# Altium PCB LSW0_HCMS29_STM32L0_Prototype.PcbDoc
Units mil, origin at the board's own origin, x right, y up, seen from the top; angles counter-clockwise.
Board outline 1790.94 x 1811.02 mil, 2 copper layers (Top Layer, Bottom Layer); 46 components, 55 nets, 201 pads, 40 vias.
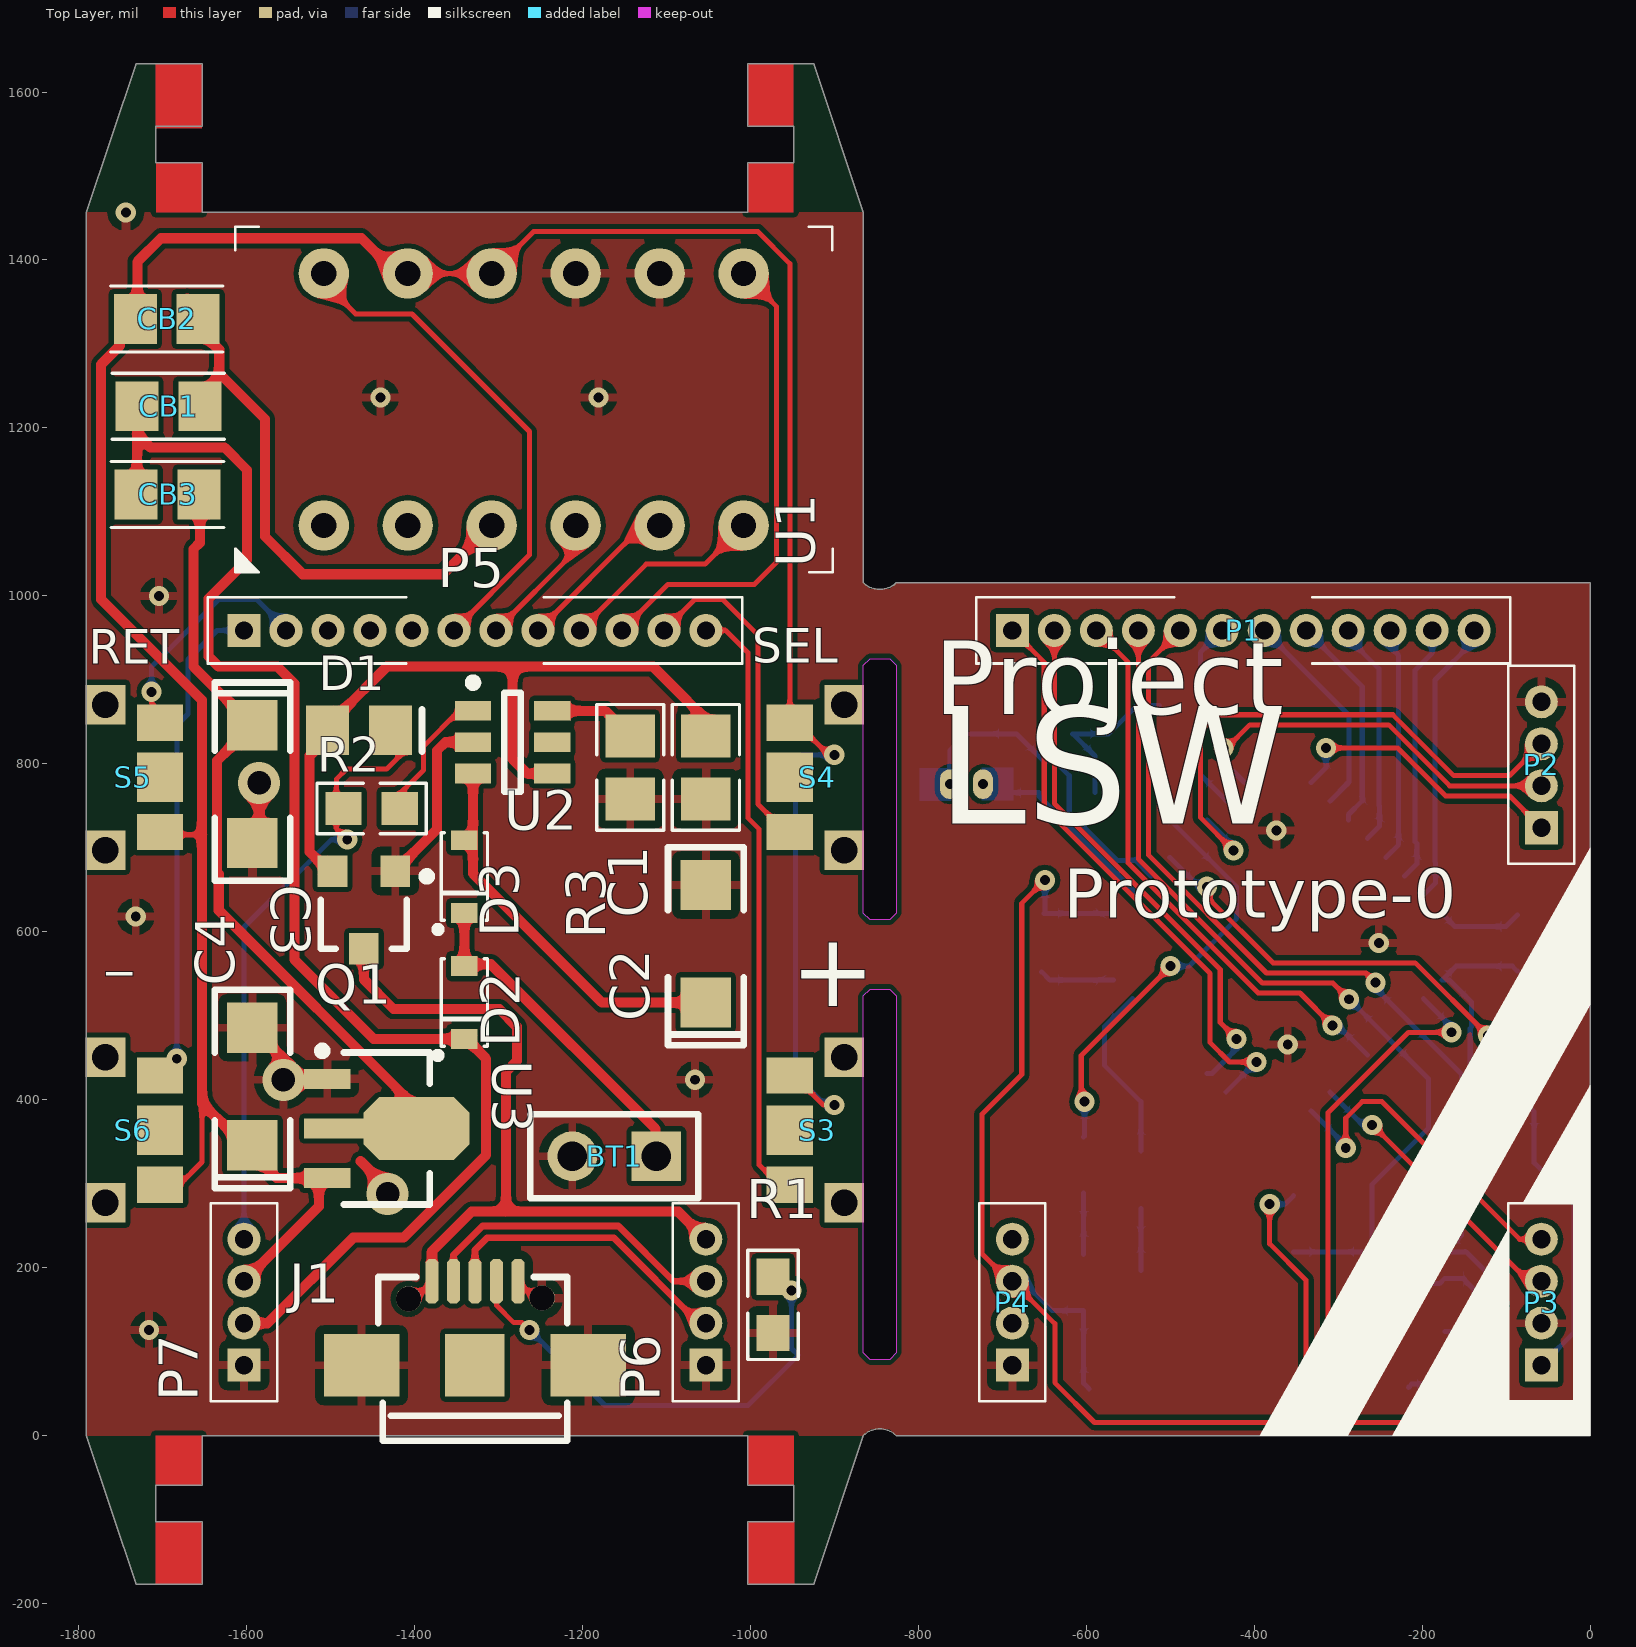
[diagram p0: Top Layer view]
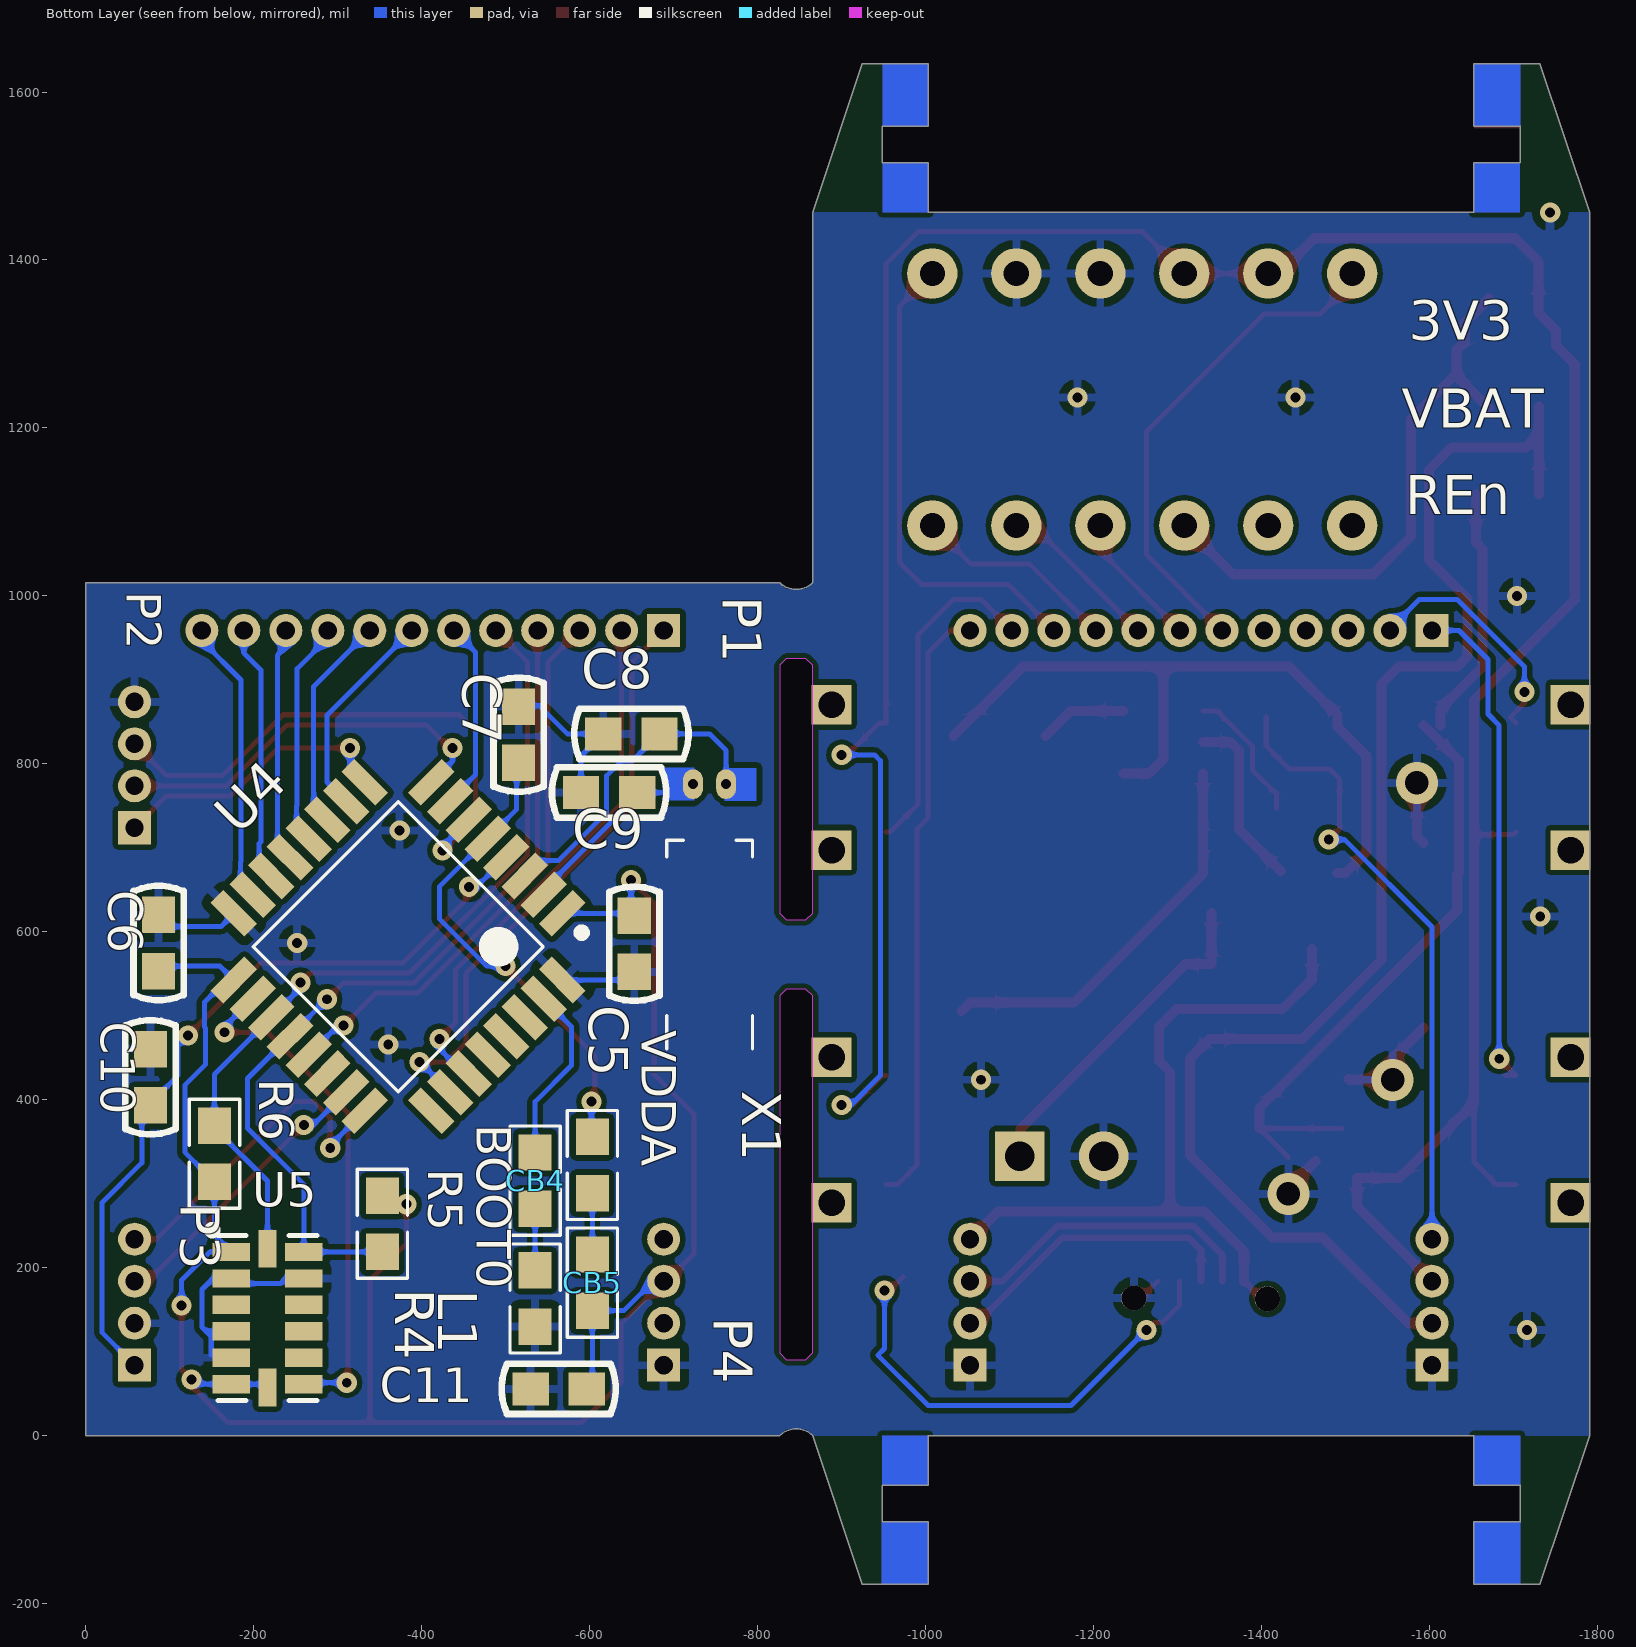
[diagram p1: Bottom Layer view, seen from below]

## Layer stack, top to bottom
Top Solder: solder mask 0.4, Solder Resist, Dk 3.5
Top Layer: signal copper 1.4
Dielectric 1: dielectric 12.6, FR-4, Dk 4.8
Bottom Layer: signal copper 1.4
Bottom Solder: solder mask 0.4, Solder Resist, Dk 3.5

## Board outline
-1708.26,-102.36 -1708.26,-59.06 -1653.14,-59.06 -1653.14,0 -1003.54,0 -1003.54,-59.06 -948.42,-59.06 -948.42,-102.36 -1003.54,-102.36 -1003.54,-177.17 -924.8,-177.17 -865.74,0 cw(c-846.26,-19.48) -826.77,0 0,0 0,1015.75 -826.77,1015.75 cw(c-846.26,1035.23) -865.74,1015.75 -865.74,1456.69 -924.8,1633.86 -1003.54,1633.86 -1003.54,1559.06 -948.42,1559.06 -948.42,1515.75 -1003.54,1515.75 -1003.54,1456.69 -1653.14,1456.69 -1653.14,1515.75 -1708.26,1515.75 -1708.26,1559.06 -1653.14,1559.06 -1653.14,1633.86 -1731.88,1633.86 -1790.94,1456.69 -1790.94,0 -1731.88,-177.17 -1653.14,-177.17 -1653.14,-102.36
cut-out: -865.74,523.62 -857.87,531.5 -834.65,531.5 -826.77,523.62 -826.77,98.43 -834.65,90.55 -857.87,90.55 -865.74,98.43
cut-out: -865.74,917.32 -857.87,925.2 -834.65,925.2 -826.77,917.32 -826.77,622.05 -834.65,614.17 -857.87,614.17 -865.74,622.05

## Design rules (kind name [scope] priority, off if disabled: settings)
Clearance [All] p1: gap=6 ignorepadtopadclearanceinfootprint=FALSE except(0: Arc-Hole Track-Hole SMDPad-Hole THPad-Hole Via-Hole Fill-Hole Poly-Hole Region-Hole Text-Hole)
ComponentClearance [All] p1 off: gap=10 collisioncheckmode=3 verticalgap=10 showdistances=FALSE
PolygonConnect [All] p1: connectstyle=Relief reliefconductorwidth=10 reliefentries=4 polygonreliefangle="90 Angle" airgapwidth=10
RoutingVias [All] p1: holewidth=28 width=50 viastyle="Through Hole" minholewidth=28 minwidth=50 maxholewidth=28 maxwidth=50
SolderMaskExpansion [All] p1: expansion=4
UnRoutedNet [All] p1: checkbadconnections=TRUE
Width [All] p1: maxlimit=15 minlimit=6 preferedwidth=6
28 further rules are at their usual default settings.

## Classes and differential pairs
component class LSWM_10: C5 C6 C7 C8 C9 C10 C11 CB4 CB5 L1 R4 R5 R6 U4 U5 X1
component class LSWM_00: BT1 C1 C2 C3 C4 CB1 CB2 CB3 D1 J1 Q1 R1 R2 R3 S3 S4 S5 S6 U1 U2 U3
component class LSW_0_HCMS29_STM32L0: P1 P2 P3 P4 P5 P6 P7

## Components (designator, comment, footprint, x,y, rotation, side; value= is the part's Value field where it differs from the comment)
BT1 "Battery" HDR2X1_A -1112.39,332.75 r180 top
C1 "Cap" 0805-1 -1053.39,795.75 r270 top value=1uF
C2 "Cap Pol" 1206-POL -1053.39,585.75 r90 top value=10uF
C3 "Cap Pol" 1206-POL -1593.39,775.75 r270 top value=10uF
C4 "Cap Pol" 1206-POL -1593.39,415.75 r90 top value=10uF
C5 "Cap" C-RAD-0603 -653.39,585.75 r270 bottom value=100nF
C6 "Cap" C-RAD-0603 -87,586.61 r270 bottom value=100nF
C7 "Cap" C-RAD-0603 -515.75,834.65 r270 bottom value=100nF
C8 "Cap" C-RAD-0603 -649.92,835.75 r180 bottom value=4.3pF
C9 "Cap" C-RAD-0603 -623.39,765.75 r180 bottom value=4.3pF
C10 "Cap" C-RAD-0603 -77.39,426.75 r270 bottom value=100nF
C11 "Cap" C-RAD-0603 -563.39,55.75 r180 bottom value=100nF
CB1 "Circuit Breaker" SB-0805 -1693.39,1225.75 r0 top
CB2 "Circuit Breaker" SB-0805 -1695.39,1329.75 r0 top
CB3 "Circuit Breaker" SB-0805 -1694.39,1120.75 r0 top
CB4 "Circuit Breaker" 0603-1 -535.39,303.75 r90 bottom
CB5 "Circuit Breaker" 0603-1 -603.39,182.28 r90 bottom
D1 "LED0" LED_0805 -1466.39,839.75 r0 top
D2 "Diode" "SOD323 - INV" -1340.94,515.75 r90 top
D3 "Diode" "SOD323 - INV" -1340.94,665.75 r90 top
J1 "USB_M" USB_MICRO -1328.34,83.86 r0 top
L1 "Inductor" 0603-1 -603.39,322.28 r90 bottom value=10uH
P1 "Header 12" HDR12X1_1.27mm -413.39,958.86 r0 top
P2 "Header 4" HDR4X1_1.27mm -58.39,723.86 r90 top
P3 "Header 4" HDR4X1_1.27mm -58.39,83.86 r90 top
P4 "Header 4" HDR4X1_1.27mm -688.39,83.86 r90 top
P5 "Header 12" HDR12X1_1.27mm -1328.34,958.86 r0 top
P6 "Header 4" HDR4X1_1.27mm -1053.34,83.86 r90 top
P7 "Header 4" HDR4X1_1.27mm -1603.34,83.86 r90 top
Q1 "MOSFET-P-E" SOT-23 -1460.63,625.98 r180 top
R1 "Res1" 0603-1 -973.39,155.75 r270 top value=100K
R2 "Res1" 0603-1 -1451.39,746.75 r180 top value=1.6K
R3 "Res1" 0805-1 -1143.39,795.75 r90 top value=1.6K
R4 "Res1" 0603-1 -535.39,163.28 r90 bottom value=10K
R5 "Res1" 0603-1 -353.39,252.28 r270 bottom value=10K
R6 "Res1" 0603-1 -153.39,335.75 r90 bottom value=10K
S3 "+" BTN_2_4_35 -888.34,363.86 r270 top
S4 "SEL" BTN_2_4_35 -888.34,783.86 r270 top
S5 "BACK" BTN_2_4_35 -1768.34,783.86 r90 top
S6 "-" BTN_2_4_35 -1768.34,363.86 r90 top
U1 "HCMS290x" HCMS-290x -1258.34,1233.86 r0 top
U2 "TP-4057" SOT23-6 -1283.39,825.75 r0 top
U3 "HT73xx" SOT89N -1433.39,365.75 r0 top
U4 "STM32L031K6" TQFP80P900X900X160-32N 98.34,582.23 r315 bottom
U5 "ADXL345BCCZ-RL7" LGA80P300X500-14N -216.59,140 r180 bottom
X1 "XTAL_SM" "X-2X6C - duplicate" -743.07,775.75 r180 bottom value=8M

## Footprints (in the part's own frame and the unit in brackets; to place one, negate y for a bottom-side part, rotate by r counter-clockwise, add the part's x,y. Pads: shape width x height; smd on the part's side, far side on the other; paste and mask are expansions set on the pad)
0603-1 [mm] "贴片带丝印"
  rect 1.1x1 smd: 1(-0.85,0) 2(0.85,0)
  silkscreen extent -1.65,-0.76 1.65,0.76, body extent -1.14,-0.38 1.14,0.38, height 1
0805-1 [mm] "贴片带丝印"
  rect 1.3x1.5 smd: 1(-0.95,0) 2(0.95,0)
  silkscreen extent -1.91,-1.02 1.91,1.02, body extent -1.14,-0.51 1.14,0.51, height 1
1206-POL [mil] "贴片元件"
  rect 60x60 smd: 1(-70,0) 2(70,0)
  silkscreen extent -121,-45 115,45, body extent -75,-35 75,35, height 39
BTN_2_4_35 [mm] "TS-018A 2*4*3.5 Key"
  rect 1.1x1.4 smd: 1(-1.65,-1.65) 2(1.65,-1.65)
  rect 1.2x1.2 hole 0.8: 3(-2.2,0) 3(2.2,0)
  rect 1.5x1.4 smd: 3(0,-1.65)
  body extent -2.25,-1.5 2.25,1.55, height 1.8
C-RAD-0603 [mm] "贴片电容"
  rect 1.1x1 smd: 1(-0.85,0) 2(0.85,0)
  silkscreen extent -1.73,-0.76 1.73,0.76, body extent -1.14,-0.38 1.14,0.38, height 1
HCMS-290x [mil]
  round 60 hole 30: 1(-250,-150) 2(-150,-150) 3(-50,-150) 4(50,-150) 5(150,-150) 6(250,-150) 7(250,150) 8(150,150) 9(50,150) 10(-50,150) 11(-150,150) 12(-250,150)
  silkscreen extent -355,-206 356,206, body extent -350,-201 350,201, height 200
HDR2X1_A [mm] "Connector; Header; 2 Position"
  rect 1.5x1.5 hole 0.9: 1(0,0)
  round 1.5 hole 0.9: 2(2.54,0)
  silkscreen extent -1.27,-1.27 3.81,1.27
HDR4X1_1.27mm [mm]
  rect 1x1 hole 0.55: 1(0,0)
  round 1 hole 0.55: 2(1.27,0) 3(2.54,0) 4(3.81,0)
  silkscreen extent -1.09,-1 4.9,1
HDR12X1_1.27mm [mm]
  rect 1x1 hole 0.55: 1(-6.985,0)
  round 1 hole 0.55: 2(-5.715,0) 3(-4.445,0) 4(-3.175,0) 5(-1.905,0) 6(-0.635,0) 7(0.635,0) 8(1.905,0) 9(3.175,0) 10(4.445,0) 11(5.715,0) 12(6.985,0)
  silkscreen extent -8.08,-1 8.08,1
LED_0805 [mm] "贴片二极管"
  rect 1.3x1.5 smd: 1(-0.95,0) 2(0.95,0)
  silkscreen extent 1.91,-0.64 1.91,0.64
LGA80P300X500-14N [mm] "LGA, 14-Leads, Body 5,0x3,0mm (max), Pitch 1,01mm, Pitch1 0,80mm, IPC Medium Density"
  rect 1.145x0.55 smd: 1(-1.098,2) 2(-1.098,1.2) 3(-1.098,0.4) 4(-1.098,-0.4) 5(-1.098,-1.2) 6(-1.098,-2) 8(1.098,-2) 9(1.098,-1.2) 10(1.098,-0.4) 11(1.098,0.4) 12(1.098,1.2) 13(1.098,2)
  rect 0.55x1.145 smd: 7(0,-2.097) 14(0,2.097)
  silkscreen extent -1.79,-2.5 1.5,2.78, body extent -1.5,-2.49 1.5,2.51, height 1.03
SB-0805 [mm] "Configurable Solder Bridge"
  rect 1.3x1.5 smd: 1(-0.95,0) 2(0.95,0)
  silkscreen extent -1.7,-1 1.7,1
"SOD323 - INV" [mm] "Molded SOD323, Body 2,7X1,35(MAX)"
  rect 0.6x0.8 smd mask+0: 1(1.1,0) 2(-1.1,0)
  silkscreen extent -1.7,-0.7 1.33,0.9, body extent -1.4,-0.67 1.4,0.68, height 1.1
SOT23-6 [mm] "Max4173"
  rect 1.1x0.6 smd: 1(-1.2,0.95) 2(-1.2,0) 3(-1.2,-0.95) 4(1.2,-0.95) 5(1.2,0) 6(1.2,0.95)
  silkscreen extent -1.32,-1.5 0.25,1.92, body extent -0.87,-1.5 0.87,1.5, height 1.45
SOT89N [mm] "SOT89, 3-Leads, Body 4.5x2.4 mm, Pitch 1.5mm, Lead Span 4.1mm, IPC Medium Density"
  rect 1.4x0.6 smd: 1(-1.8,1.5) 3(-1.8,-1.5)
  rect 1.8x0.6 smd: 2(-1.6,0)
  oct 3.2x1.9 smd: 2(0.9,0)
  silkscreen extent -2.07,-2.3 1.3,2.47, body extent -1.3,-2.3 1.3,2.3, height 1.6
SOT-23 [mm]
  rect 0.9x0.95 smd: 1(-0.95,-1.175) 2(0.95,-1.175) 3(0,1.175)
  silkscreen extent -2.03,-1.14 1.3,1.18
TQFP80P900X900X160-32N [mm] "TQFP, 32-Leads, Body 7.00x7.00mm, Pitch 0.80mm, IPC Medium Density"
  rect 1.45x0.55 smd: 1(-12.675,11.25) 2(-12.675,10.45) 3(-12.675,9.65) 4(-12.675,8.85) 5(-12.675,8.05) 6(-12.675,7.25) 7(-12.675,6.45) 8(-12.675,5.65) 17(-4.225,5.65) 18(-4.225,6.45) 19(-4.225,7.25) 20(-4.225,8.05) 21(-4.225,8.85) 22(-4.225,9.65) 23(-4.225,10.45) 24(-4.225,11.25)
  rect 0.55x1.45 smd: 9(-11.25,4.225) 10(-10.45,4.225) 11(-9.65,4.225) 12(-8.85,4.225) 13(-8.05,4.225) 14(-7.25,4.225) 15(-6.45,4.225) 16(-5.65,4.225) 25(-5.65,12.675) 26(-6.45,12.675) 27(-7.25,12.675) 28(-8.05,12.675) 29(-8.85,12.675) 30(-9.65,12.675) 31(-10.45,12.675) 32(-11.25,12.675)
  silkscreen extent -12.8,5.35 -5.35,12.2, body extent -12.95,3.95 -3.95,12.95, height 1.6
USB_MICRO [mm] "USB方孔"
  oct 0.4x1.35 smd: 1(-1.3,2.54) 2(-0.65,2.54) 3(0,2.54) 4(0.65,2.54) 5(1.3,2.54)
  rect 2.286x1.9 smd: 6(3.429,0) 7(-3.429,0)
  rect 1.8x1.9 smd: 8(0,0)
  silkscreen extent -2.92,-2.29 2.79,2.67
"X-2X6C - duplicate" [mm] "Cylinder Xtal"
  oval 0.6x0.9 hole 0.3: 1(-0.5,0) 2(0.5,0)
  silkscreen extent -1.3,-8 1.3,-1.7, body extent -0.99,-8 1,-2, height 2

## Part data
BT1: library part Battery_1, "备份电池", LatestRevisionDate=17-Jul-2002, LatestRevisionNote="Re-released for DXP Platform.", PackageReference=BAT-2, Published=24-Mar-1999, Publisher="Altium Limited"
C1 C5 C6 C7 C8 C9 C10 C11: "无极性电容", LatestRevisionDate=17-Jul-2002, LatestRevisionNote="Re-released for DXP Platform.", PackageReference=RAD-0.3, Published=8-Jun-2000, Publisher="Altium Limited"
C2 C3 C4: "极性电解电容", LatestRevisionDate=17-Jul-2002, LatestRevisionNote="Re-released for DXP Platform.", PackageReference=RB7.6-15, Published=8-Jun-2000, Publisher="Altium Limited", Vol=16V
D1: "发光二极管", LatestRevisionDate=08-Jul-2005, LatestRevisionNote="Mech Layer 1 removed.", PackageReference=LED-0, Published=8-Jun-2000, Publisher="Altium Limited"
D2 D3: "二极管", PackageDocument=Sep-1996, Code_JEDEC=DO-214-AB, LatestRevisionDate=17-Jul-2002, LatestRevisionNote="Re-released for DXP Platform.", PackageReference=SMC, Published=8-Jun-2000, Publisher="Altium Limited", Type=1N4001
J1: "MicroUSB接口"
L1: "电感", Code_IEC=1005, Code_JEITA=0402, LatestRevisionDate=17-Jul-2002, LatestRevisionNote="Re-released for DXP Platform.", PackageReference=0402-A, Published=8-Jun-2000, Publisher="Altium Limited"
P1 P2 P3 P4 P5 P6 P7: "接插件", LatestRevisionDate=17-Jul-2002, LatestRevisionNote="Re-released for DXP Platform.", Publisher="Altium Limited"
Q1: "P-Channel Enhanced MOSFET", PackageDocument=1995/1996, LatestRevisionDate=17-Jul-2002, LatestRevisionNote="Re-released for DXP Platform.", PackageReference=E3, Published=8-Jun-2000, Publisher="Altium Limited"
R1 R2 R3 R4 R5 R6: "贴片电阻", LatestRevisionDate=17-Jul-2002, LatestRevisionNote="Re-released for DXP Platform.", PackageReference=AXIAL-0.4, Published=8-Jun-2000, Publisher="Altium Limited"
S3 S4 S5 S6: library part SW-PB, "微动开关", LatestRevisionDate=17-Jul-2002, LatestRevisionNote="Re-released for DXP Platform.", PackageReference=SPST-2, Published=24-Mar-1999, Publisher="Altium Limited"
U1: "HCMS LED display module"
U2: "500mA Linear Lithium Battery Charger"
U5: library part ADI-ADXL34X-CC-14-1, "3-Axis, +/-2 g / +/-4 g / +/-8 g / +/-16 g Digital Accelerometer with Digital Output, 1.6 KHz BW, Industrial, 14-pin LGA, Reel"
X1: "圆柱晶振", LatestRevisionDate=17-Jul-2002, LatestRevisionNote="Re-released for DXP Platform.", PackageReference=R38, Published=8-Jun-2000, Publisher="Altium Limited"
CB1 CB2 CB3 CB4 CB5: LatestRevisionDate=17-Jul-2002, LatestRevisionNote="Re-released for DXP Platform.", PackageDescription="Switch; 2 Leads", PackageReference=SPST-2, Published=24-Mar-1999, Publisher="Altium Limited"

## Free pads (board coordinates)
  round 30 hole 30 paste+0 mask+0: 0(-1407.34,162.86) 0(-1248.34,163.86)

## Via types
v1: diameter 24, hole 11.81, Top Layer to Bottom Layer, 37 vias
v2: diameter 50, hole 28, Top Layer to Bottom Layer, 3 vias

## Nets (pads, with @x,y where several pads share a name; then routed paths per layer and width w, separated by ;. In a path a pad name is that pad's centre, name@x,y a point inside that pad or via, vN(x,y) a via of type N, cw(c..) or ccw(c..) an arc to the next point about the centre after c; other vN are vias at no path point)
3V3: C4.1 CB2.1 P7.3 S3.1 S4.1 S5.1 S6.1 U1.10 U1.11 U3.3 | length 3597.7
  Top Layer w6: S6.1 -1680.24,298.9 -1653.39,325.75 -1653.39,395.75 ; S5.1 -1700.23,715.75 -1653.39,715.75 ; U1.11 U1.10 -1258.34,1433.86 -991.5,1433.86 -953.3,1395.66 S4.1 -945.46,848.82 -907.39,810.75 v1(-900.39,810.75) ; S3.1 -948.45,428.82 -913.37,393.75 v1(-900.39,393.75)
  Top Layer w12: P7.3 -1514.25,272.94 -1514.25,306.69 -1564.33,306.69 -1653.39,395.75 -1653.39,715.75 -1653.39,875.75 -1773.39,995.75 -1773.39,1275.75 -1750.79,1298.35 -1750.79,1316.35 -1730.39,1336.75 -1730.39,1397.75 -1702.28,1425.86 -1463.5,1425.86 -1421.5,1383.86 U1.11
  Bottom Layer w6: v1(-900.39,393.75) -911.39,393.75 -946.39,428.75 -946.39,803.75 -939.39,810.75 v1(-900.39,810.75)
ADXL_INT1: U4.18 U5.8 | length 614.5
  Top Layer w6: v1(-311.02,62.99) -312.34,64.31 -312.34,384.51 -216.54,480.31 v1(-165.35,480.31)
  Bottom Layer w6: v1(-311.02,62.99) -261.54,62.99 U5.8 ; U4.18 -165.35,486.8 v1(-165.35,480.31)
ADXL_INT2: U5.9
GND: BT1.2 C1.2 C2.2 C3.2 C4.2 C5.2 C6.1 C7.1 C8.1 C9.1 C10.1 C11.1 J1.5 J1.6 J1.7 P2.4 P3.2 P4.1 P6.1 P7.1 pad.0@-1248.34,163.86 Q1.1 R1.2 R3.1 R4.1 U1.8 U1.9 U2.2 U3.1 U4.16 U4.32 U5.2 U5.4 U5.5 U5.12 | length 1166.2
  Top Layer w6: C4.2@-1593.39,483.75 C4.2 ; J1.5 -1257.16,163.86 pad.0@-1248.34,163.86
  Top Layer w12: C4.2 -1556.39,448.75 v2(-1556.39,423.75) -1505.31,423.75 U3.1 ; C3.2 -1585.39,713.75 v2(-1585.39,777.39) ; -1464.39,326.75 -1432.39,294.75 v2(-1432.39,287.75) ; Q1.1 -1373.39,722.09 -1373.39,815.75 -1363.39,825.75 U2.2
  Bottom Layer w6: C5.2 -643.66,542.56 U4.32 ; C9.1 -589.92,809.21 C8.1 -573.7,835.75 -540.24,869.21 C7.1@-513.39,869.21 ; U5.12 -238.43,187.24 -232.28,181.1 -179.53,181.1 U5.2 -151.81,187.24 -138.59,174.03 -138.59,129.12 -143.46,124.25 ; U4.16 -176.57,621.45 -161.42,606.3 -100.78,606.3 C6.1 ; U5.5 -169.92,96.22 -149.61,96.22 -149.61,118.11 -143.46,124.25 ; U5.4 -143.46,124.25
  other v1: -1716.54,125.98 -1066.39,423.75 -360.39,465.75 -251.97,586.61 -1732.28,618.11 -374.02,720.47 -1704.72,1000 -1440.94,1236.22 -1181.1,1236.22 -1744.09,1456.69
NetBT1_1: BT1.1 D2.1 D3.2 | length 379.4
  Top Layer w12: D3.2 -1340.94,561.42 -1309.45,561.42 -1113.39,365.35 BT1.1@-1113.39,355.75
NetC1_1: C1.1 D1.1 Q1.2 U2.4 | length 902.9
  Top Layer w12: Q1.2@-1490.16,670.12 -1500.35,670.12 -1525.19,694.95 -1525.19,809.75 -1490.89,844.05 -1490.89,858.25 -1433.39,915.75 -1283.39,915.75 ; U2.4 -1266.14,788.35 -1283.39,805.59 -1283.39,915.75 ; C1.1@-1033.39,833.15 -1115.98,915.75 -1283.39,915.75
NetC2_1: C2.1 D3.1 U2.3 | length 474.1
  Top Layer w12: U2.3 -1330.63,669.21 -1177.17,515.75 C2.1 C2.1@-1043.39,505.75
NetC3_1: C3.1 CB3.2 U3.2 | length 1041.6
  Top Layer w6: U3.2@-1496.38,365.75 -1397.95,365.75 U3.2@-1432.39,331.31
  Top Layer w12: CB3.2@-1655.98,1120.75 -1655.98,1063.15 -1663.39,1055.75 -1663.39,915.75 -1613.39,865.75 C3.1@-1613.39,845.75 ; C3.1 -1635.39,803.75 -1635.39,670.78 -1633.39,668.78 -1633.39,625.51 -1397.95,390.08 U3.2@-1397.95,365.75
NetC8_2: C8.2 U4.3 X1.2 | length 383.7
  Bottom Layer w6: X1.2 -762.76,815.98 -742.99,835.75 C8.2 -650.79,803.15 -637.8,803.15 -620.57,785.93 -620.57,742.34 -563.28,685.04 -541.76,685.04 U4.3
NetC9_2: C9.2 U4.2 X1.1 | length 238.4
  Bottom Layer w6: X1.1 -713.39,765.75 C9.2 -656.85,761.64 -545.44,650.23 U4.2
NetCB1_2: CB1.2 CB2.2 U1.3 | length 690
  Top Layer w12: CB1.2@-1670.94,1223.86 -1632.83,1261.97 ; CB2.2@-1670.94,1353.86 -1642.39,1325.31 -1642.39,1302.75 -1632.83,1293.19 -1632.83,1261.97 ; U1.3 -1366.45,1025.75 -1533.39,1025.75 -1578.39,1070.75 -1578.39,1210.75 -1629.61,1261.97 -1632.83,1261.97
NetCB4_1: CB4.1 R4.2 | length 73.5
  Bottom Layer w6: R4.2 CB4.1
NetCB4_2: CB4.2 U4.31 | length 212.8
  Bottom Layer w6: U4.31 -578.74,486.99 -578.74,440.94 -535.39,397.59 CB4.2@-535.39,339.21
NetCB5_2: CB5.2 L1.1 | length 73.1
  Bottom Layer w6: CB5.2 L1.1
NetD1_2: D1.2 P7.4 R2.2 | length 753.7
  Top Layer w6: v1(-1480.39,709.75) -1493.39,722.75 -1493.39,781.75 -1481.39,793.75 -1433.39,793.75 -1405.98,821.15 D1.2@-1405.98,855.75
  Bottom Layer w6: P7.4 -1603.34,605.8 -1499.39,709.75 v1(-1480.39,709.75)
NetJ1_1: J1.1 P6.4 pad.0@-1407.34,162.86 Q1.3 | length 899.2
  Top Layer w6: pad.0@-1407.34,162.86 -1400.52,162.86 J1.1
  Top Layer w12: Q1.3 -1460.63,543.31 -1425.28,507.95 -1299.29,507.95 -1278.39,487.05 -1278.39,446.02 -1291.34,433.07 -1291.34,266.75 ; J1.1 -1379.52,219.61 -1332.39,266.75 -1291.34,266.75 ; P6.4 -1086.23,266.75 -1291.34,266.75
NetJ1_2: J1.2 P6.3 | length 373.5
  Top Layer w8: J1.2 -1353.93,215.2 -1319.39,249.75 -1157.59,249.75 -1091.7,183.86 P6.3
NetJ1_3: J1.3 P6.2 | length 360.5
  Top Layer w8: J1.3 -1328.34,221 -1313.59,235.75 -1163.39,235.75 -1061.5,133.86 P6.2
NetJ1_4: J1.4 R1.1 | length 571.5
  Top Layer w6: J1.4 -1302.75,155.11 -1282.08,134.45 -1272.08,134.45 v1(-1263.39,125.75) ; R1.1 -956.92,172.75 v1(-951.39,172.75)
  Bottom Layer w6: v1(-1263.39,125.75) -1173.39,35.75 -1003.39,35.75 -943.39,95.75 -951.39,103.75 v1(-951.39,172.75)
NetP5_1: P5.1 S6.2 | length 603.3
  Top Layer w6: S6.2@-1690.31,428.82 S6.2 v1(-1683.39,448.81)
  Bottom Layer w6: v1(-1683.39,448.81) -1683.39,845.75 -1669.91,859.22 -1669.91,924.32 -1635.38,958.86 P5.1
NetP5_2: P5.2 S5.2 | length 286.4
  Top Layer w6: v1(-1713.39,885.75) -1713.39,872.44 -1696.57,855.63 S5.2
  Bottom Layer w6: v1(-1713.39,885.75) -1713.39,915.75 -1633.39,995.75 -1588.13,995.75 -1553.34,960.96 P5.2
NetP5_6: P5.6 U1.12 | length 626.7
  Top Layer w6: U1.12 -1496.45,1395.75 -1496.45,1361.81 -1470.39,1335.75 -1403.39,1335.75 -1263.39,1195.75 -1263.39,1048.81 P5.6
NetP5_7: P5.7 U1.4 | length 164.4
  Top Layer w6: P5.7 -1208.34,1053.86 U1.4
NetP5_8: P5.8 U1.5 | length 196.8
  Top Layer w6: P5.8 -1128.34,1083.86 U1.5
NetP5_9: P5.9 U1.6 | length 246.8
  Top Layer w6: P5.9 -1124.45,1037.75 -1054.45,1037.75 U1.6
NetP5_10: P5.10 U1.7 | length 577.7
  Top Layer w6: P5.10 -1098.45,1013.75 -995.39,1013.75 -969.34,1039.8 -969.34,1344.86 U1.7
NetP5_11: P5.11 S4.2 | length 398.1
  Top Layer w6: P5.11 -1066.45,995.75 -1033.39,995.75 -991.39,953.75 -991.39,752.13 -958.15,718.9 S4.2
NetP5_12: P5.12 S3.2 | length 723
  Top Layer w6: P5.12 -1029.72,958.86 -1003.39,932.52 -1003.39,735.75 -989.86,722.22 -989.86,322.22 -966.54,298.9 S3.2
NetR2_1: R2.1 U2.1 | length 162.3
  Top Layer w6: R2.1 -1417.92,764.21 -1389.39,792.75 -1389.39,820.96 -1347.2,863.15 U2.1
NetR3_2: R3.2 U2.6 | length 105.2
  Top Layer w12: U2.6 -1173.39,863.15 R3.2
STM32L0_EXTI0: P1.11 U4.14 | length 307.7
  Bottom Layer w6: U4.14 -206.55,681.01 -206.55,704.97 -208.66,707.09 -208.66,911.61 -188.39,931.89 P1.11
STM32L0_EXTI1: P1.12 U4.15 | length 340.7
  Bottom Layer w6: U4.15 -198.35,644.17 -184.28,658.24 -184.28,682.7 -185.04,683.46 -185.04,899.8 -138.39,946.46 P1.12
STM32L0_EXTI3: P1.1 U4.26 | length 704.5
  Top Layer w6: P1.1 -650.39,920.86 -650.39,747.86 -452.76,550.23 -452.76,467.98 -429.66,444.88 v1(-397.64,444.88)
  Bottom Layer w6: U4.26 -398.13,444.88 v1(-397.64,444.88)
STM32L0_EXTI4: P1.2 U4.27 | length 635.4
  Top Layer w6: P1.2 -638.39,752.83 -440.76,555.2 -440.76,491.94 v1(-421.26,472.44)
  Bottom Layer w6: U4.27 -450.68,431.21 -421.26,460.63 v1(-421.26,472.44)
STM32L0_I2C1_SCL: P1.5 R6.2 U4.19 U5.14 | length 993.2
  Top Layer w6: P1.5 -526.39,920.86 -526.39,691.74 -385.64,550.99 -267.53,550.99 v1(-255.91,539.37)
  Bottom Layer w6: v1(-255.91,539.37) -255.91,532.81 U4.19 -153.39,430.29 R6.2 ; U5.14 -216.59,303.09 R6.2@-157.48,362.2
STM32L0_I2C1_SDA: P1.4 R5.2 U4.20 U5.13 | length 1053.7
  Top Layer w6: P1.4 -538.39,686.77 -390.61,538.99 -306.71,538.99 v1(-287.4,519.69)
  Bottom Layer w6: R5.2 -259.88,218.82 U5.13 -259.8,299.25 -192.91,366.14 -192.91,425.28 -287.32,519.69 v1(-287.4,519.69)
STM32L0_LPUART_RX: P2.1 U4.9 | length 344.3
  Top Layer w6: v1(-314.96,818.9) -229.57,818.9 -172.53,761.86 -96.39,761.86 P2.1
  Bottom Layer w6: U4.9 -314.96,795.31 v1(-314.96,818.9)
STM32L0_LPUART_TX: P2.2 U4.8 | length 471.6
  Top Layer w6: v1(-437.01,818.9) -433.07,818.9 -405.51,846.46 -240.16,846.46 -167.56,773.86 P2.2
  Bottom Layer w6: v1(-437.01,818.9) -437.01,803 U4.8
STM32L0_NRST: C10.2 P3.1 U4.4 | length 924.7
  Top Layer w6: v1(-456.69,653.54) -456.69,641.73 -377.95,562.99 -208.66,562.99 v1(-122.05,476.38)
  Bottom Layer w6: U4.4 -465.72,653.54 v1(-456.69,653.54) ; v1(-122.05,476.38) -110.24,464.57 -110.24,429.13 -66.93,385.83 -66.93,324.88 -19.68,277.64 -19.68,122.56 P3.1
STM32L0_PA0: P2.3 U4.6 | length 667.6
  Top Layer w6: v1(-425.2,696.85) -464.57,736.22 -464.57,838.58 -444.69,858.46 -235.19,858.46 -162.59,785.86 -96.39,785.86 P2.3
  Bottom Layer w6: U4.6 -425.2,702.1 v1(-425.2,696.85)
STM32L0_PA1: P1.6 U4.7 | length 226.8
  Bottom Layer w6: P1.6 -464.57,932.68 -464.57,787.4 -434.08,756.92 U4.7
STM32L0_PA4: P1.7 U4.10 | length 254.6
  Bottom Layer w6: P1.7 -287.4,857.87 -287.4,778.33 U4.10
STM32L0_PA5: P1.8 U4.11 | length 260
  Bottom Layer w6: P1.8 -271.65,892.13 -271.65,755.91 -287.93,739.63 U4.11
STM32L0_PA6: P1.9 U4.12 | length 269.4
  Bottom Layer w6: P1.9 -288.39,949.8 -251.97,913.39 -251.97,750.39 -251.09,749.51 -251.09,725.55 U4.12
STM32L0_PA7: P1.10 U4.13 | length 280.5
  Bottom Layer w6: U4.13 -228.35,703.75 -228.35,929.13 -238.39,939.17 P1.10
STM32L0_PA11: P1.3 U4.21 | length 672.1
  Top Layer w6: P1.3 -550.39,920.86 -550.39,681.8 -395.58,526.99 -345.89,526.99 v1(-307.09,488.19)
  Bottom Layer w6: v1(-307.09,488.19) -300.37,488.19 U4.21
STM32L0_PA12: U4.22
STM32L0_PB5: U4.28
STM32L0_PB6: U4.29
STM32L0_PB7: U4.30
STM32L0_SWCLK: P3.4 U4.24 | length 405.6
  Top Layer w6: v1(-291.34,342.52) -291.34,377.95 -271.65,397.64 -248.03,397.64 -84.25,233.86 P3.4
  Bottom Layer w6: U4.24 -291.34,345.53 v1(-291.34,342.52)
STM32L0_SWDIO: P3.3 U4.23 | length 345
  Top Layer w6: v1(-259.84,370.08) -73.62,183.86 P3.3
  Bottom Layer w6: U4.23 -271.34,370.08 v1(-259.84,370.08)
VBAT: CB1.1 CB3.1 D2.2 P7.2 | length 1702.6
  Top Layer w12: CB3.1@-1730.79,1120.75 -1730.79,1193.15 ; CB1.1 -1730.79,1193.15 ; P7.2 -1575.28,133.86 -1473.39,235.75 -1413.39,235.75 -1314.96,334.17 -1314.96,448.75 -1338.65,472.44 D2.2 -1448.82,472.44 -1543.39,567.01 -1543.39,895.75 -1563.39,915.75 -1633.39,915.75 -1645.39,927.75 -1645.39,996.81 -1599.64,1042.56 -1599.64,1150 -1626.39,1176.75 -1714.39,1176.75 -1730.79,1193.15
VDD: C5.1 C6.2 C11.2 CB5.1 P4.3 R5.1 R6.1 U4.1 U4.17 U5.1 U5.6 U5.7 | length 2619.6
  Top Layer w6: v1(-649.61,661.42) -677.17,633.86 -677.17,429.95 -724.41,382.71 -724.41,216.54 -691.73,183.86 P4.3 -637.8,133.27 -637.8,62.99 -590.55,15.75 -338.58,15.75 ; v1(-381.89,275.59) -381.89,228.35 -338.58,185.04 -338.58,15.75 ; v1(-114.39,154.75) -114.39,78.53 v1(-125.98,66.93) -125.98,59.06 -169.29,15.75 -338.58,15.75
  Bottom Layer w6: P4.3 -675.98,183.86 -640.94,148.82 CB5.1 -603.39,62.28 C11.2 ; v1(-649.61,661.42) -649.61,622.99 -650.7,621.9 U4.1 ; v1(-381.89,275.59) -363.54,275.59 R5.1 ; U5.7 -212.76,61.26 U5.6 -131.65,61.26 v1(-125.98,66.93) ; v1(-114.39,154.75) -114.39,185.25 -147.87,218.74 U5.1 -153.39,238.74 R6.1 -118.11,337.56 -118.11,417.32 -143.05,442.26 -143.05,485.08 -141.73,486.39 -141.73,516.25 -168.04,542.56 U4.17 -160.08,559.06 -92.9,559.06 C6.2
VDDA: C7.2 L1.2 U4.5 | length 576.4
  Top Layer w6: v1(-602.36,397.64) -606.3,401.57 -606.3,452.76 v1(-500,559.06)
  Bottom Layer w6: L1.2 -602.36,356.77 v1(-602.36,397.64) ; C7.2@-513.39,802.28 -513.39,745.75 -421.26,653.62 -421.26,615.67 -477.87,559.06 v1(-500,559.06)
pads on no net: J1.8 P4.2 P4.4 P5.3 P5.4 P5.5 S3.3 S4.3 S5.3 S6.3 U1.1 U1.2 U2.5 U4.25 U5.3 U5.10 U5.11

## Polygon pours and split planes (outlines as drawn)
GND on Bottom Layer "GND_L02_P004" (solid, remove dead copper, pour order 4): -1790.94,1456.69 -865.74,1456.69 -865.74,1015.75 -857.87,1007.87 -834.65,1007.87 -826.77,1015.75 0,1015.75 0,0 -5.39,0 -826.77,0 -834.65,7.87 -857.87,7.87 -865.74,0 -1790.94,0
GND on Top Layer "GND_L01_P006" (solid, remove dead copper, pour order 6): -1790.94,1456.69 -865.74,1456.69 -865.74,1015.75 -857.87,1007.87 -834.65,1007.87 -826.77,1015.75 0,1015.75 0,0 -5.39,0 -826.77,0 -834.65,7.87 -857.87,7.87 -865.74,0 -1790.94,0

## Other copper
Top Layer:
  rectangle: -1708.26,1556.75 -1653.14,1559.06
  region: -1653.54,0 -1708.66,0 -1708.66,-59.06 -1653.54,-59.06
  region: -1653.14,-102.36 -1708.66,-102.36 -1708.66,-177.17 -1653.14,-177.17
  region: -948.42,0 -1003.54,0 -1003.54,-59.06 -948.42,-59.06
  region: -948.02,-102.36 -1003.54,-102.36 -1003.54,-177.17 -948.02,-177.17
  rectangle: -1003.94,1456.69 -948.82,1515.75
  rectangle: -1004.34,1559.06 -948.82,1633.86
  rectangle: -1708.66,1559.06 -1653.14,1633.86
  rectangle: -1708.26,1456.69 -1653.14,1515.75
Bottom Layer:
  region net NetC9_2: -686.93,795.59 -725.35,795.59 -725.35,756.22 -686.93,756.22
  rectangle net NetC8_2: -799.21,755.91 -760.79,795.28
  region: -1653.54,0 -1708.66,0 -1708.66,-59.06 -1653.54,-59.06
  region: -1653.14,-102.36 -1708.66,-102.36 -1708.66,-177.17 -1653.14,-177.17
  region: -948.42,0 -1003.54,0 -1003.54,-59.06 -948.42,-59.06
  region: -948.02,-102.36 -1003.54,-102.36 -1003.54,-177.17 -948.02,-177.17
  rectangle: -1003.94,1456.69 -948.82,1515.75
  rectangle: -1004.34,1559.06 -948.82,1633.86
  rectangle: -1708.66,1559.06 -1653.14,1633.86
  rectangle: -1708.26,1456.69 -1653.14,1515.75

## Silkscreen, mask and mechanical layers (free items; w line width, h text height)
Top Overlay:
  region: 0,417.22 -80.71,276.97 -19.02,276.97 -19.02,40.75 -97.76,40.75 -97.76,246.06 -184.84,90.75 -236.22,0 0,0
  region: 0,699.91 0,513.27 -288.71,0 -393.7,0
  text "SEL" at -998.39,906.75 h70
  text "RET" at -1788.39,905.75 h70
  text "Project" at -781.5,830.71 h150
  text "LSW" at -778.54,683.07 h240
  text "Prototype-0" at -627.21,597.56 h100
  text "-" at -1773.39,491.75 h150
  text "+" at -952.39,482.75 h150
Bottom Overlay:
  text "3V3" at -1575.39,1289.75 h80
  text "VBAT" at -1567.39,1184.75 h80
  text "REn" at -1571.39,1081.75 h80
  text "VDDA" at -648.39,482.75 h70 r90
  text "BOOT0" at -452.39,370.75 h70 r90
Top Solder:
  region: -1653.14,0 -1708.26,0 -1708.26,-59.06 -1653.14,-59.06
  region: -1652.74,-102.36 -1708.26,-102.36 -1708.26,-177.17 -1652.74,-177.17
  region: -948.02,0 -1003.13,0 -1003.13,-59.06 -948.02,-59.06
  region: -947.61,-102.36 -1003.13,-102.36 -1003.13,-177.17 -947.61,-177.17
  rectangle: -1004.34,1456.69 -949.22,1515.75
  rectangle: -1004.74,1559.06 -949.22,1633.86
  rectangle: -1709.06,1559.06 -1653.54,1633.86
  rectangle: -1708.66,1456.69 -1653.54,1515.75
  region: -865.74,1015.75 -857.87,1007.87 -834.65,1007.87 -826.77,1015.75 -826.77,917.32 -834.65,925.2 -857.87,925.2 -865.74,917.32
  region: -865.74,622.05 -857.87,614.17 -834.65,614.17 -826.77,622.05 -826.77,523.62 -834.65,531.5 -857.87,531.5 -865.74,523.62
  region: -865.74,98.43 -857.87,90.55 -834.65,90.55 -826.77,98.43 -826.77,0 -834.65,7.87 -857.87,7.87 -865.74,0
Bottom Solder:
  rectangle: -793.39,432.75 -693.39,485.75
  region: -681.76,797.75 -725.35,797.75 -725.35,753.75 -681.76,753.75
  rectangle: -804.39,753.75 -760.79,797.75
  region: -1652.74,-102.36 -1708.26,-102.36 -1708.26,-177.17 -1652.74,-177.17
  region: -1653.14,0 -1708.26,0 -1708.26,-59.06 -1653.14,-59.06
  region: -947.61,-102.36 -1003.13,-102.36 -1003.13,-177.17 -947.61,-177.17
  region: -948.02,0 -1003.13,0 -1003.13,-59.06 -948.02,-59.06
  rectangle: -1004.74,1559.06 -949.22,1633.86
  rectangle: -1004.34,1456.69 -949.22,1515.75
  rectangle: -1708.66,1456.69 -1653.54,1515.75
  rectangle: -1709.06,1559.06 -1653.54,1633.86
  region: -865.74,1015.75 -857.87,1007.87 -834.65,1007.87 -826.77,1015.75 -826.77,917.32 -834.65,925.2 -857.87,925.2 -865.74,917.32
  region: -865.74,622.05 -857.87,614.17 -834.65,614.17 -826.77,622.05 -826.77,523.62 -834.65,531.5 -857.87,531.5 -865.74,523.62
  region: -865.74,98.43 -857.87,90.55 -834.65,90.55 -826.77,98.43 -826.77,0 -834.65,7.87 -857.87,7.87 -865.74,0
Mechanical 1:
  lines w3.94: -865.74,523.62 cw(c-846.26,504.14) -826.77,523.62 ; -865.74,622.05 ccw(c-846.26,641.53) -826.77,622.05 ; -865.74,917.32 cw(c-846.26,897.84) -826.77,917.32 ; -826.77,98.43 cw(c-846.26,117.91) -865.74,98.43 ; -865.74,0 cw(c-846.26,-19.48) -826.77,0 0,0 0,1015.75 -826.77,1015.75 cw(c-846.26,1035.23) -865.74,1015.75 ; -865.74,0 -865.74,98.43 ; -865.74,0 -924.8,-177.17 -1003.54,-177.17 -1003.54,-102.36 -948.42,-102.36 -948.42,-59.06 -1003.54,-59.06 -1003.54,0 -1653.14,0 -1653.14,-59.06 -1708.26,-59.06 -1708.26,-102.36 -1653.14,-102.36 -1653.14,-177.17 -1731.88,-177.17 -1790.94,0 -1790.94,1456.69 -1731.88,1633.86 -1653.14,1633.86 -1653.14,1559.06 -1708.26,1559.06 -1708.26,1515.75 -1653.14,1515.75 -1653.14,1456.69 -1003.54,1456.69 -1003.54,1515.75 -948.42,1515.75 -948.42,1559.06 -1003.54,1559.06 -1003.54,1633.86 -924.8,1633.86 -865.74,1456.69 -865.74,1015.75 ; -865.74,98.43 -865.74,1015.75
Mechanical 13:
  lines w3.94: -826.77,0 -826.77,1015.75
Mechanical 15:
  lines w3.94: -1328.34,-191.14 -1328.34,1633.86 ; -413.39,-122.05 -413.39,1122.05

## Dimensions
-1790.94,1456.69 to -1790.94,0 on Mechanical 13
-924.8,1633.86 to -865.74,1456.69 on Mechanical 13
-1790.94,1456.69 to 0,1015.75 on Mechanical 13
-1003.54,1559.06 to -948.42,1515.75 on Mechanical 13
0,1015.75 to 0,0 on Mechanical 13
-826.77,1015.75 to 0,1015.75 on Mechanical 13
-1653.14,1633.86 to -1003.54,1633.86 on Mechanical 1
-1790.94,1456.69 to -865.74,1456.69 on Mechanical 1
-1731.88,1633.86 to -1731.88,-177.17 on Mechanical 1